# Altium PCB AlarmBJT.PcbDoc
Units mil, origin at the board's own origin, x right, y up, seen from the top; angles counter-clockwise.
Board outline 1331.05 x 2755.91 mil, 4 copper layers (Top Layer, Ground Plane, Power Plane, Bottom Layer), stack 59.692 mil thick; 40 components, 28 nets, 161 pads, 96 vias.
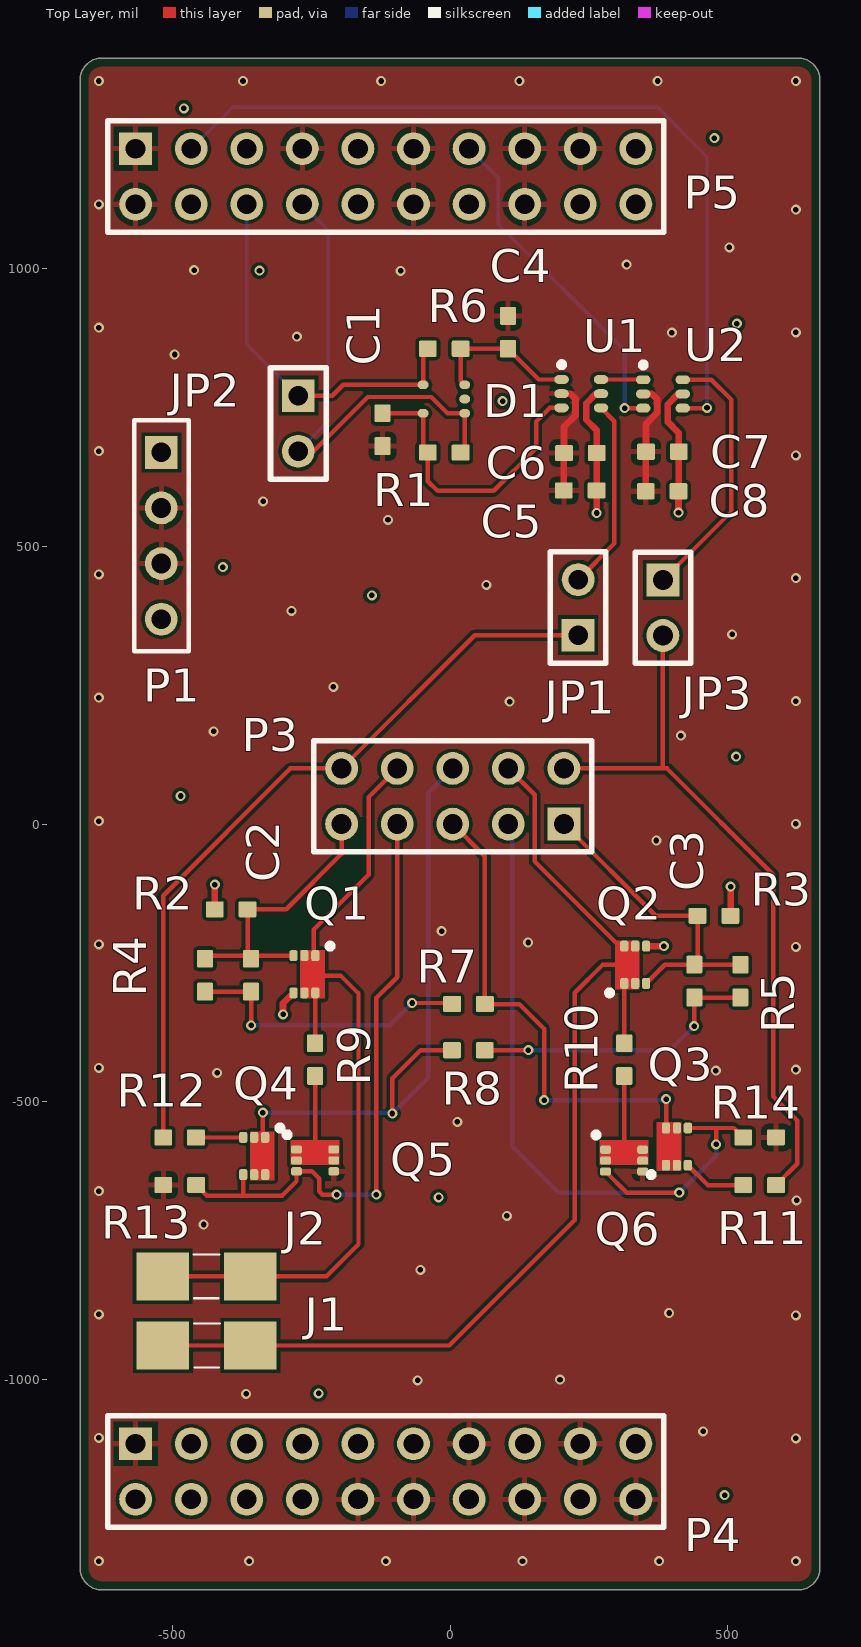
[diagram p0: Top Layer view]
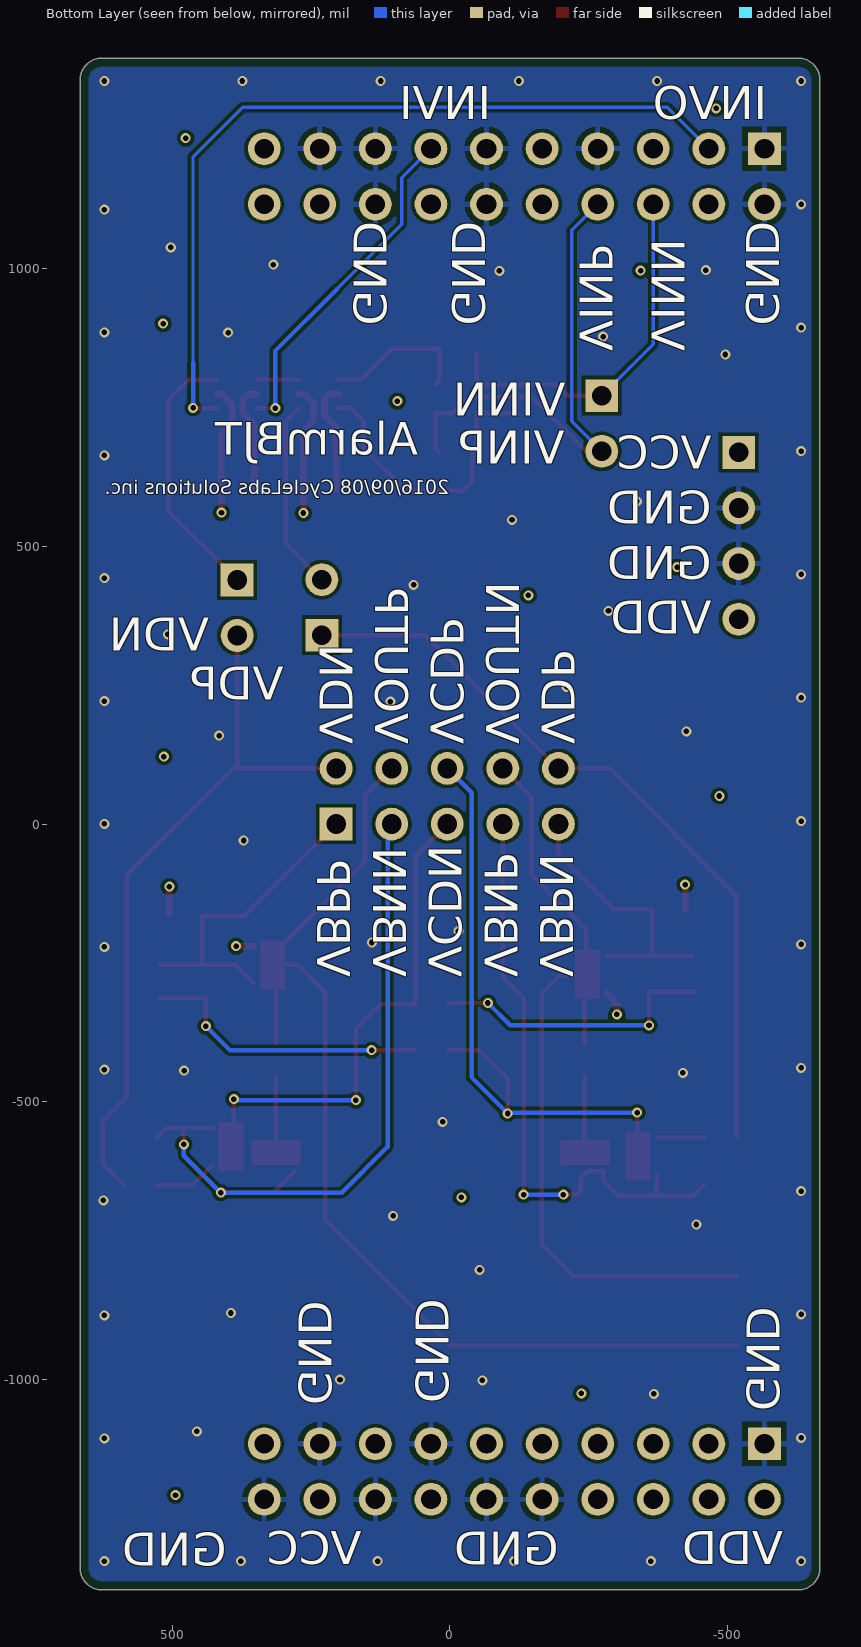
[diagram p1: Bottom Layer view, seen from below]
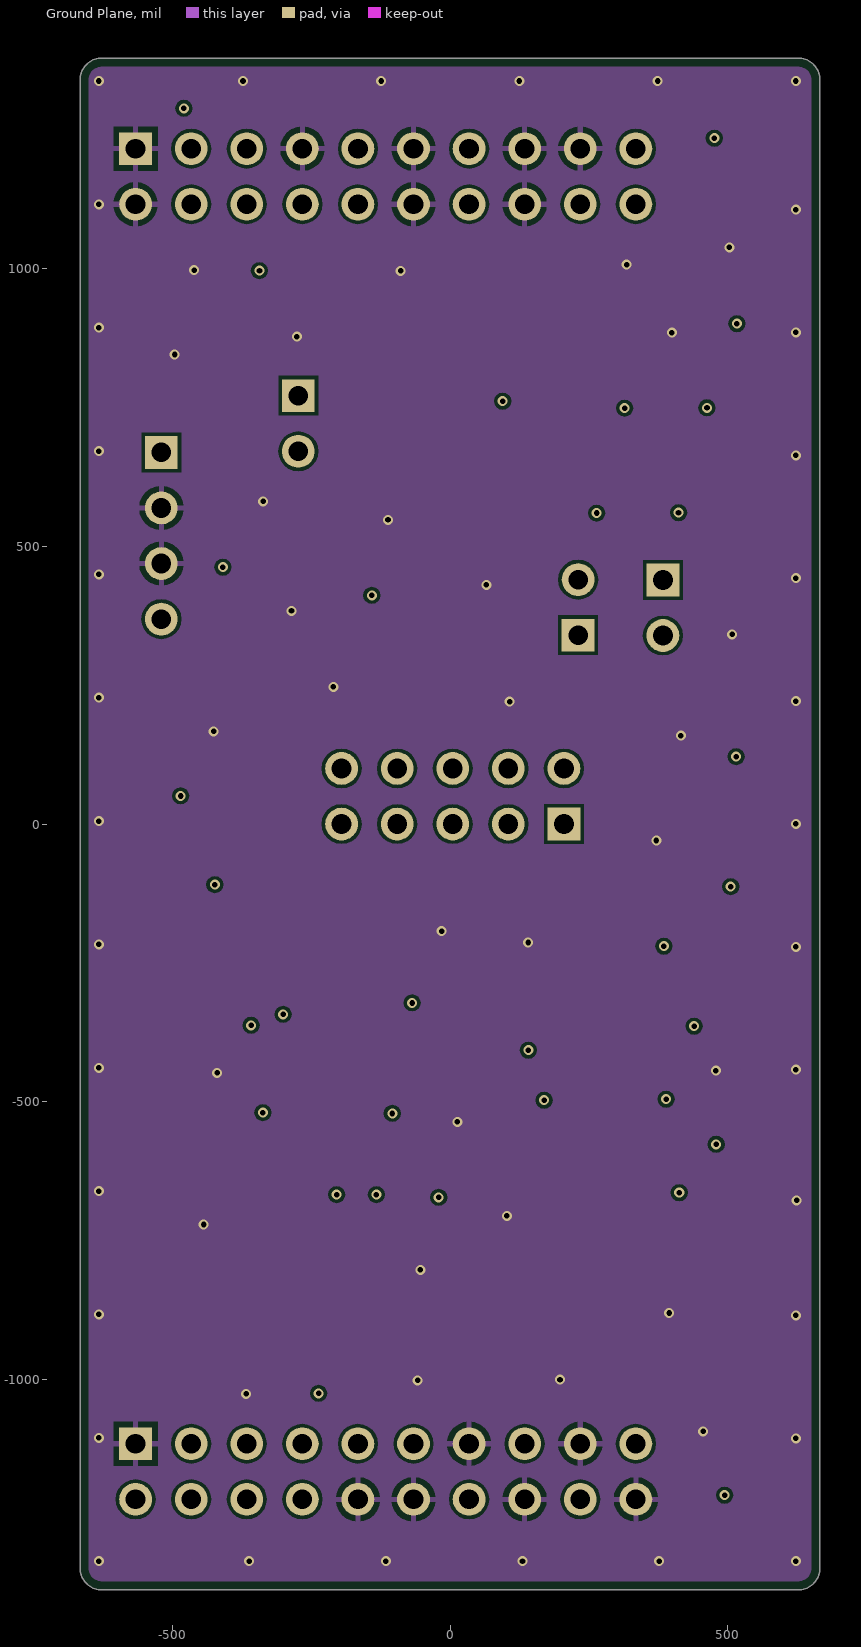
[diagram p2: Ground Plane]
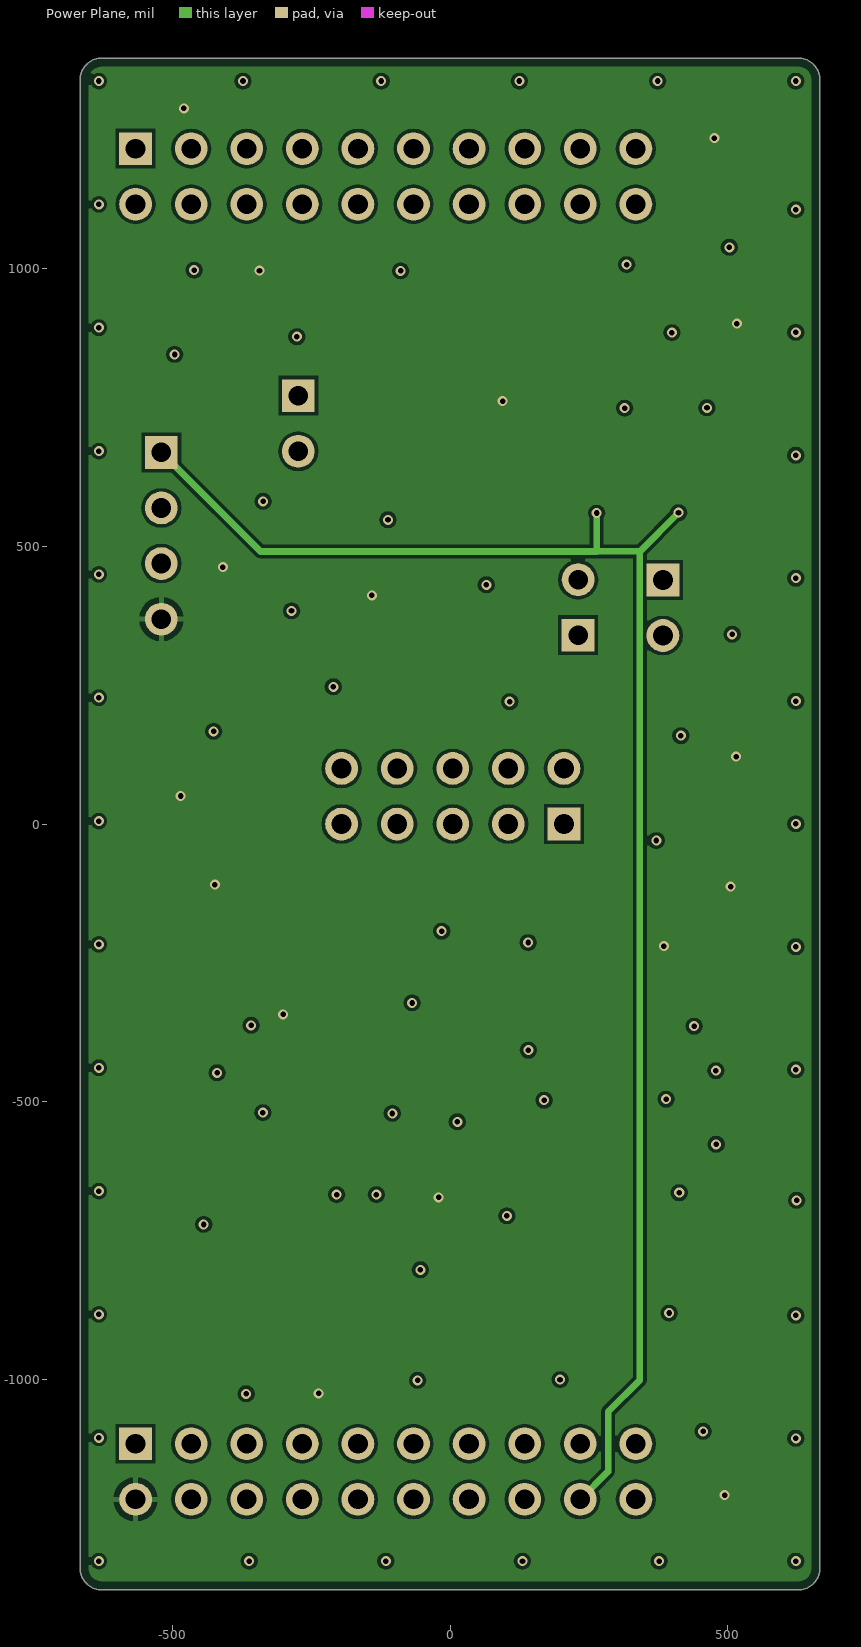
[diagram p3: Power Plane]

## Layer stack, top to bottom
Top Solder: solder mask 1, Solder Resist, Dk 4.8
Top Layer: signal copper 1.38
Prepreg Top: prepreg 6.811, 2116+1080, Dk 4.8
Ground Plane: signal copper 1.38
PCB Core: core 40.55, S1000-2, Dk 4.8
Power Plane: signal copper 1.38
Prepreg Bottom: prepreg 6.811, 2116+1080, Dk 4.8
Bottom Layer: signal copper 1.38
Bottom Solder: solder mask 1, Solder Resist, Dk 4.8

## Board outline
-665.55,-1338.58 ccw(c-626.18,-1338.58) -626.18,-1377.95 626.13,-1377.95 ccw(c626.13,-1338.58) 665.5,-1338.58 665.5,1338.58 ccw(c626.13,1338.58) 626.13,1377.95 -626.18,1377.95 ccw(c-626.18,1338.58) -665.55,1338.58

## Design rules (kind name [scope] priority, off if disabled: settings)
AcuteAngle [All] p1: minimum=6.00000000000000E+0001 checktracksonly=TRUE
AssemblyTestPointUsage AssemblyTestPointUsage_NoTP [InNet('ANT') Or InNet('RF') Or InNet('NetC20_2')  Or InNet('P0.09/NFC1') Or InNet('P0.10/NFC2') Or InNet('XC_N') Or InNet('XC_P') Or InNet('XL_N') Or InNet('XL_P')] p1: valid=1
AssemblyTestPointUsage AssemblyTestPointUsage_Power [InNet('VDD_NRF') Or InNet('VLED') OR InNet('PGND') OR InNet('GND') OR InNet('VBZ') OR InNet('VUSB') Or InNet('VBAT') Or InNet('DGND') Or InNet('AGND') Or InNet('S2V8')] p2: allowmultiple=TRUE
AssemblyTestPointUsage [All] p3:
AssemblyTestpoint AssemblyTestpoint_TP [InComponent('TP*')] p1: testpointundercomponent=TRUE minsize=35 maxsize=59.06 preferedsize=35 minholesize=0 maxholesize=39.37 preferedholesize=10 testpointgrid=1 usegrid=FALSE gridoriginx=2810.98 gridoriginy=2760.98 gridtolerance=0.01 allowsidebottom=TRUE minspacing=83
AssemblyTestpoint AssemblyTestpoint_ShortComponents [((IsPad And (OnTopLayer Or OnBottomLayer)) Or (IsVia) Or (IsPad And OnMultiLayer)) And (IsComponent And (Height < 150))] p2: testpointundercomponent=TRUE minsize=35 maxsize=59.06 preferedsize=35 minholesize=0 maxholesize=39.37 preferedholesize=10 testpointgrid=1 usegrid=FALSE gridoriginx=2810.98 gridoriginy=2760.98 gridtolerance=0.01 allowsidebottom=TRUE minspacing=83 compbodyclearance=40
AssemblyTestpoint AssemblyTestpoint_TallComponents [(IsPad And (OnTopLayer Or OnBottomLayer)) Or (IsVia) Or (IsPad And OnMultiLayer)] p3: testpointundercomponent=TRUE minsize=35 maxsize=59.06 preferedsize=35 minholesize=0 maxholesize=39.37 preferedholesize=10 testpointgrid=1 usegrid=FALSE gridtolerance=0.01 allowsidebottom=TRUE minspacing=83 compbodyclearance=55
BoardOutlineClearance BoardOutlineClearance_Component [IsComponent] p1: gap=66
BoardOutlineClearance [All] p2: gap=15
Clearance Clearance_Hole_Copper [InPadClass('NPTH')] p1: gap=8
Clearance Clearance_QFN_DFN_SOT563 [HasFootprint('QFN-44') Or HasFootprint('DFN10') Or HasFootprint('SOT563')] p2: gap=4
Clearance [All] p3: gap=6
ComponentClearance ComponentClearance_COAXSWITCH [HasFootprint('COAXIAL-SWF') Or InComponent('TP*')] p1: gap=0 collisioncheckmode=3 verticalgap=0 showdistances=FALSE
ComponentClearance [All] p2: gap=10 collisioncheckmode=3 verticalgap=10 showdistances=FALSE
DiffPairsRouting [Not InDifferentialPair('BZ_OUT')] p1: maxlimit=10 minlimit=6 mostfreqgap=8 toplayer_minwidth=6 toplayer_maxwidth=10 toplayer_prefwidth=8 midlayer1_minwidth=6 midlayer1_maxwidth=10 midlayer1_prefwidth=8 midlayer2_minwidth=6 midlayer2_maxwidth=10 midlayer2_prefwidth=8 bottomlayer_minwidth=6 bottomlayer_maxwidth=10 bottomlayer_prefwidth=8 maxuncoupledlength=500
FabricationTestPointUsage FabricationTestPointUsage_NoTP [InNet('ANT') Or InNet('RF') Or InNet('NetC20_2') Or InNet('P0.09/NFC1') Or InNet('P0.10/NFC2') Or InNet('XC_N') Or InNet('XC_P') Or InNet('XL_N') Or InNet('XL_P')] p1: valid=1 allowmultiple=FALSE
FabricationTestPointUsage FabricationTestPointUsage_Power [InNet('VDD_NRF') Or InNet('VLED') OR InNet('PGND') OR InNet('GND') OR InNet('VBZ') OR InNet('VUSB') Or InNet('VBAT') Or InNet('DGND') Or InNet('AGND') Or InNet('S2V8')] p2: valid=0 allowmultiple=TRUE
FabricationTestPointUsage [All] p3: valid=0 allowmultiple=FALSE
FabricationTestpoint FabricationTestpoint_TP [InComponent('TP*')] p1: side=2 testpointundercomponent=TRUE minsize=35 maxsize=59.06 preferedsize=35 minholesize=0 maxholesize=39.37 preferedholesize=10 testpointgrid=1 allowsidebottom=TRUE usegrid=FALSE gridtolerance=0.01 minspacing=83
FabricationTestpoint FabricationTestpoint_ShortComponents [((IsPad And (OnTopLayer Or OnBottomLayer)) Or (IsVia) Or (IsPad And OnMultiLayer)) And (IsComponent And (Height < 150))] p2: side=2 testpointundercomponent=TRUE minsize=35 maxsize=59.06 preferedsize=35 minholesize=0 maxholesize=39.37 preferedholesize=10 testpointgrid=1 allowsidebottom=TRUE usegrid=FALSE gridtolerance=0.01 minspacing=83 compbodyclearance=40
FabricationTestpoint FabricationTestpoint_TallComponents [(IsPad And (OnTopLayer Or OnBottomLayer)) Or (IsVia) Or (IsPad And OnMultiLayer)] p3: side=2 testpointundercomponent=TRUE minsize=35 maxsize=59.06 preferedsize=35 minholesize=0 maxholesize=39.37 preferedholesize=10 testpointgrid=1 allowsidebottom=TRUE usegrid=FALSE gridoriginx=2810.98 gridoriginy=2760.98 gridtolerance=0.01 minspacing=83 compbodyclearance=55
FanoutControl Fanout_LCC [IsLCC] p1: bgadir=Out bgaviamode=Centered fanoutstyle=Auto fanoutdirection=Alternating viagrid=1 // Fanout_LCC (Default Rule)
FanoutControl Fanout_BGA [IsBGA] p2: bgadir=Out bgaviamode=Centered fanoutstyle=Auto fanoutdirection=Alternating viagrid=1 // Fanout_BGA (Default Rule)
FanoutControl Fanout_Small [(CompPinCount < 5)] p3: bgadir=Out bgaviamode=Centered fanoutstyle=Auto fanoutdirection=OutThenIn viagrid=1 // Fanout_Small (Default Rule)
FanoutControl Fanout_SOIC [IsSOIC] p4: bgadir=Out bgaviamode=Centered fanoutstyle=Auto fanoutdirection=Alternating viagrid=1 // Fanout_SOIC (Default Rule)
HoleSize [All] p1: absolutevalues=TRUE maxlimit=100 minlimit=10 maxpercent=80.000 minpercent=20.000
HoleToHoleClearance [All] p1: gap=6 allowstackedmicrovias=TRUE
MinimumAnnularRing [All] p1: minimumring=4
MinimumSolderMaskSliver MinimumSolderMaskSliver_QFN_DFN [IsVia And (HasFootprint('DSQ10-1500X900TP') Or HasFootprint('QFN-44')) vs IsVia And (HasFootprint('DSQ10-1500X900TP') Or HasFootprint('QFN-44'))] p1: minsoldermaskwidth=0
MinimumSolderMaskSliver MinimumSolderMaskSliver_QFN_DFN_1 [HasFootprint('QFN40P600X600X90-48N') Or HasFootprint('DSQ10-1500X900TP') Or HasFootprint('DRC10-2400X1650TP') Or HasFootprint('DRV6-1600X1000TP') Or HasFootprint('WDFN8') Or HasFootprint('59453061110ECHLF') vs HasFootprint('QFN40P600X600X90-48N') Or HasFootprint('DSQ10-1500X900TP') Or HasFootprint('DRC10-2400X1650TP') Or HasFootprint('DRV6-1600X1000TP') Or HasFootprint('WDFN8') Or HasFootprint('59453061110ECHLF')] p2: minsoldermaskwidth=2
MinimumSolderMaskSliver MinimumSolderMaskSliver_QFN_DFN_2 [IsPad And (HasFootprint('QFN-44')) vs IsPad And (HasFootprint('QFN-44'))] p3: minsoldermaskwidth=0
MinimumSolderMaskSliver [All] p4: minsoldermaskwidth=4
PolygonConnect PolygonConnect_Direct [(IsVia And InNet('GND')) Or (IsVia And InNet('VCC')) Or (IsVia And InNet('VDD'))] p1: connectstyle=Direct reliefconductorwidth=10 reliefentries=4 polygonreliefangle="90 Angle" airgapwidth=10
PolygonConnect [All] p2: connectstyle=Relief reliefconductorwidth=10 reliefentries=4 polygonreliefangle="90 Angle" airgapwidth=10
RoutingVias [All] p1: holewidth=13 width=27 viastyle="Through Hole" minholewidth=10 minwidth=18 maxholewidth=28 maxwidth=50
SilkToBoardRegionClearance SilkToBoardRegionClearance_1 [All] p2:
SolderMaskExpansion [All] p1: expansion=0
Width Width_RF [InNet('ANT') Or InNet('RF') Or InNet('NetC17_2')] p1 off: maxlimit=20 minlimit=10.43 preferedwidth=15 toplayer_maxwidth=10.43 toplayer_prefwidth=10.43 midlayer1_minwidth=12 midlayer2_minwidth=12 bottomlayer_maxwidth=10.43 bottomlayer_prefwidth=10.43 impedancedriven=TRUE minimp=0.000000 maximp=500.000000 favimp=200.000000
Width Width_Power [InNet('VCC') Or InNet('VDD') Or InNet('GND')] p2: maxlimit=50 minlimit=8 preferedwidth=12
Width [All] p3: maxlimit=16 minlimit=6 preferedwidth=6
17 further rules are at their usual default settings.

## Classes and differential pairs
component class U_2_ALARM: C1 C2 C3 C4 C5 C6 C7 C8 D1 JP1 JP2 JP3 Q1 Q2 Q3 Q4 Q5 Q6 R1 R2 R3 R4 R5 R6 R7 R8 R9 R10 R11 R12 R13 R14 U1 U2
component class 1_TOP: J1 J2 P1 P3 P4 P5

## Components (designator, comment, footprint, x,y, rotation, side; value= is the part's Value field where it differs from the comment)
C1 "1 nF" Varitron_CAP0603 -121.5,709.4 r90 top
C2 "220 pF" Varitron_CAP0603 -358,-272 r90 top
C3 "220 pF" Varitron_CAP0603 439.5,-282.5 r90 top
C4 "1 nF" Varitron_CAP0603 104.4,884.6 r270 top
C5 "1.0 uF" Varitron_CAP0603 234.2,600.2 r180 top
C6 "100 nF" Varitron_CAP0603 234.6,667.4 r180 top
C7 "100 nF" Varitron_CAP0603 382.1,669.8 r180 top
C8 "100 nF" Varitron_CAP0603 381.6,598.7 r180 top
D1 "#NAME?" SC70-5 -11,764.5 r90 top
J1 "709296001002006" 709296001002006 -437.8,-938.2 r180 top
J2 "709296001002006" 709296001002006 -438.5,-813.8 r180 top
JP1 "JMP_2PINS_100MILS" HDR_2X1_100MILS 230.5,339.6 r180 top
JP2 "JMP_2PINS_100MILS" HDR_2X1_100MILS -273,770.5 r0 top
JP3 "JMP_2PINS_100MILS" HDR_2X1_100MILS 383,439.1 r0 top
P1 "MTLW-104-07-L-S-125" SMTC-MTLW-104-07-X-S-125 -519.4,668.6 r270 top
P3 "HDR_2x5_100MILS" HDR_2X5_100MILS 204.9,-0.1 r180 top
P4 "HDR_2x10_100MILS" HDR_2X10_100MILS -565.7,-1115 r0 top (schematic designator P6)
P5 "HDR_2x10_100MILS" HDR_2X10_100MILS -565.7,1215 r0 top (schematic designator P7)
Q1 "#NAME?" SOT563 -262,-270.27 r180 top
Q2 "#NAME?" SOT563 333.1,-253.3 r0 top
Q3 "#NAME?" SOT563 408.1,-580.43 r0 top
Q4 "#NAME?" SOT563 -352.3,-597.4 r180 top
Q5 "#NAME?" SOT563 -242.7,-605.2 r270 top
Q6 "#NAME?" SOT563 313.2,-605.6 r270 top
R1 "1.8k Ohm" Varitron_RES0603 -10.5,668.2 r0 top
R2 "3.3k Ohm" Varitron_RES0603 -393.7,-153.5 r180 top
R3 "3.3k Ohm" Varitron_RES0603 474.9,-165.2 r0 top
R4 "3.3k Ohm" Varitron_RES0603 -440.7,-272 r90 top
R5 "3.3k Ohm" Varitron_RES0603 522.3,-282.7 r90 top
R6 "1.8k Ohm" Varitron_RES0603 -10.4,855.1 r180 top
R7 "0.0 Ohm" Varitron_RES0603 33.2,-323.9 r180 top
R8 "0.0 Ohm" Varitron_RES0603 32.9,-407 r180 top
R9 "0.0 Ohm" Varitron_RES0603 -242.6,-423.9 r270 top
R10 "0.0 Ohm" Varitron_RES0603 313.4,-423.9 r270 top
R11 "10k Ohm" Varitron_RES0603 557,-649.6 r0 top
R12 "10k Ohm" Varitron_RES0603 -486.6,-564 r180 top
R13 "3.3k Ohm" Varitron_RES0603 -486.3,-649.6 r180 top
R14 "3.3k Ohm" Varitron_RES0603 557,-563.7 r180 top
U1 "#NAME?" SOT363_SC70_6 236.2,774.2 r270 top
U2 "#NAME?" SOT363_SC70_6 383.1,773.7 r270 top

## Footprints (in the part's own frame and the unit in brackets; to place one, negate y for a bottom-side part, rotate by r counter-clockwise, add the part's x,y. Pads: shape width x height; smd on the part's side, far side on the other; paste and mask are expansions set on the pad)
709296001002006 [mm] "Connector Wire to Board, 2.0 x 2.0 mm, 2 pads, 2.4 x 2.2 mm, 4 mm pitch"
  rect 2.4x2.2 smd: 1(-2,0) 1(2,0)
  silkscreen extent -0.6,-1 0.58,1, body extent -3,-1 3,1, height 2
HDR_2X1_100MILS [mm] "Header 100 mils, 2 rows, 2 pins. 0.9mm hole, 1.5 mm side"
  rect 1.5x1.5 hole 0.9: 1(0,0)
  round 1.5 hole 0.9: 2(0,-2.54)
  silkscreen extent -1.27,-3.81 1.27,1.27
HDR_2X5_100MILS [mm] "Header 100 mils, 2 rows, 10 pins. 0.9mm hole, 1.5 mm side"
  rect 1.5x1.5 hole 0.9: 1(0,0)
  round 1.5 hole 0.9: 2(0,-2.54) 3(2.54,0) 4(2.54,-2.54) 5(5.08,0) 6(5.08,-2.54) 7(7.62,0) 8(7.62,-2.54) 9(10.16,0) 10(10.16,-2.54)
  silkscreen extent -1.27,-3.81 11.43,1.27
HDR_2X10_100MILS [mm] "Header 100 mils, 2 rows, 20 pins. 0.9mm hole, 1.5 mm side"
  rect 1.5x1.5 hole 0.9: 1(0,0)
  round 1.5 hole 0.9: 2(0,-2.54) 3(2.54,0) 4(2.54,-2.54) 5(5.08,0) 6(5.08,-2.54) 7(7.62,0) 8(7.62,-2.54) 9(10.16,0) 10(10.16,-2.54) 11(12.7,0) 12(12.7,-2.54) 13(15.24,0) 14(15.24,-2.54) 15(17.78,0) 16(17.78,-2.54) 17(20.32,0) 18(20.32,-2.54) 19(22.86,0) 20(22.86,-2.54)
  silkscreen extent -1.27,-3.81 24.13,1.27
SC70-5 [mm] "SC70-5, 0.4 x 0.5 mm pads, 0.65 x 1.9 mm pitch"
  oval 0.4x0.5 smd mask+0.051: 1(-0.65,-0.95) 2(0,-0.95) 3(0.65,-0.95) 4(0.65,0.95) 5(-0.65,0.95)
  body extent -1,-0.63 1,0.63, height 1.1
SMTC-MTLW-104-07-X-S-125 [mm] "Terminal Assembly, 1x4 Pins, Vertical, 2.54mm Pitch, Male"
  rect 1.5x1.5 hole 0.9: 1(0,0)
  round 1.5 hole 0.9: 2(2.54,0) 3(5.08,0) 4(7.62,0)
  silkscreen extent -1.46,-1.24 9.08,1.24, body extent -1.27,-1.24 8.89,1.24, height 4.7
SOT363_SC70_6 [mil] "SOT363-6, SC70, 2 x 1.25 x 1 mm body, 16 x 26 mils pads, 26 x 71 mils pitch"
  oval 16x26 smd mask+2: 1(-25.5,-35.5) 2(0,-35.5) 3(25.5,-35.5) 4(25.5,35.5) 5(0,35.5) 6(-25.5,35.5)
  silkscreen extent -57,-40 -47,-31, body extent -39,-25 39,25, height 39
SOT563 [mm] "SOT563, 1.25 x 1.7 mm body, 6 pins, 0.375 x 0.5 mm pads, 0.5 x 1.7 mm pitch"
  rrect50% 0.375x0.5 smd mask+0: 1(-0.5,-0.85) 2(0,-0.85) 3(0.5,-0.85) 4(0.5,0.85) 5(0,0.85) 6(-0.5,0.85)
  silkscreen extent -1.3,-1.41 -1.05,-1.16, body extent -0.85,-0.63 0.85,0.63, height 0.6
Varitron_CAP0603 [mil] "Capacitor 0603(1608), max 1mm height"
  rrect17% 32x29 smd: 1(-29.5,0) 2(29.5,0)
  body extent -33,-19 33,19, height 39
Varitron_RES0603 [mil] "Resistor 0603(1608), max 1mm height"
  rrect17% 32x29 smd: 1(-29.5,0) 2(29.5,0)
  body extent -33,-19 33,19, height 39

## Part data
C1: library part Varitron_CAP0603, "1 nF 10V X7R 10% 0603 (1608 Metric)  SMD"
C2 C3: library part Varitron_CAP0603, "220 pF 50V X7R 10% 0603 (1608 Metric)  SMD"
C4: library part Varitron_CAP0603, "1 nF V TEMP TOL% 0603 (1608 Metric)  SMD"
C5 C8: library part Varitron_CAP0603, "1.0 uF 16V X7R 10% 0603 (1608 Metric)  SMD"
C6 C7: library part Varitron_CAP0603, "100 nF 16V X7R 10% 0603 (1608 Metric)  SMD"
D1: library part BAS21DW5T1G, "High Voltage Switching Diode"
J1 J2: "Connector, Single Horizontal Contact, 2 x 2 mm"
JP1 JP2 JP3: "Jumper, 100 mils, 2 pins"
P1: library part SMTC-MTLW-104-07-X-S-125, "Low Profile .025\" SQ Post Header, Through-hole, Vertical, -55 to 125 degC, 2.54 mm Pitch, 4-Pin, Male, RoHS"
P3: "Header, 100 mils, 2 rows, 10 pins"
P4 P5: "Header, 100 mils, 2 rows, 20 pins"
Q1 Q2: library part DSS5140V, "PNP SMT Transistor, Low VCESAT"
Q3 Q4 Q5 Q6: library part DSS4240V, "NPN SMT Transistor, Low VCESAT"
R1 R6: library part Varitron_RES0603, "1k8 0.063W 5%  0603 (1608 Metric)  SMD"
R2 R3 R4 R5 R13 R14: library part Varitron_RES0603, "3k3 0.063W 5%  0603 (1608 Metric)  SMD"
R7 R8 R9 R10: library part Varitron_RES0603, "0R0 0..1W JUMPER  0603 (1608 Metric)  SMD"
R11 R12: library part Varitron_RES0603, "10k 0.063W 5%  0603 (1608 Metric)  SMD"
U1: library part NL27WZ14DFT2G, "IC Dual Inverter with Schmitt Trigger Inputs"
U2: library part 74LVC2GU04DCKRG4, "Dual Inverter Gate"

## Via types
v1: diameter 18, hole 10, Top Layer to Bottom Layer, tented both sides, 76 vias
v2: diameter 18, hole 10, Top Layer to Bottom Layer, tented top, 20 vias

## Nets (pads, with @x,y where several pads share a name; then routed paths per layer and width w, separated by ;. In a path a pad name is that pad's centre, name@x,y a point inside that pad or via, vN(x,y) a via of type N, cw(c..) or ccw(c..) an arc to the next point about the centre after c; other vN are vias at no path point)
GND: C1.1 C4.1 C5.2 C6.2 C7.2 C8.2 P1.2 P1.3 P4.1 P4.10 P4.12 P4.13 P4.16 P4.17 P4.20 P5.1 P5.2 P5.7 P5.11 P5.12 P5.15 P5.16 P5.17 Q5.4 Q6.4 R13.2 R14.1 U1.2 U2.2 | length 405.2
  Top Layer w12: U1.2 216.4,774.2 225.7,764.9 225.7,735.2 205.1,714.6 C6.2 204.7,667 C5.2 ; U2.2 363.2,773.7 372.6,764.3 372.6,739.92 352.6,719.92 C7.2 352.1,669.3 C8.2
  other v1: -631.8,-1326.2 -361.28,-1326.2 -115.46,-1326.2 130.36,-1326.2 376.18,-1326.2 622,-1326.2 622,-1105.14 -631.8,-1104.29 455.3,-1092.6 -366.8,-1025.1 -58.3,-1000.9 197.9,-999.6 622,-884.08 -631.8,-882.38 394.1,-879.8 -53.2,-802 -443.2,-720.5 102.3,-705.2 623.6,-677.1 -631.8,-660.48 13.1,-535.7 -419,-447.7 478.3,-443.9 622,-441.97 -631.8,-438.57 622,-220.91 -631.8,-216.66 140.5,-213.2 -15,-192.8 371.2,-29.7 622,0.15 -631.8,5.25 415.2,158.9 -425.4,166.6 107.4,220.1 622,221.21 -631.8,227.16 -210,246.9 507.6,341.2 -285.2,383.3 65.3,430.4 622,442.27 -631.8,449.07 -111.6,547.2 -336.3,580.5 622,663.32 -631.8,670.97 -495.5,844.7 -275.7,876.8 399.2,884.2 622,884.38 -631.8,892.88 -88.9,995.1 -460.5,996.5 317.7,1006.5 502.4,1037.6 622,1105.44 -631.8,1114.79 -631.8,1336.7 -372.48,1336.7 -123.86,1336.7 124.76,1336.7 373.38,1336.7 622,1336.7
INV_IN: P5.13 U2.3 | length 616.2
  Top Layer w8: v2(314.1,748.2) U2.3
  Bottom Layer w6: P5.13 86.8,1162.5 86.8,1079 203.1,962.7
  Bottom Layer w8: 203.1,962.7 314.1,851.7 v2(314.1,748.2)
INV_OUT: P5.3 U2.4 | length 1491.4
  Top Layer w8: U2.4 461.8,748.2 v2(462.3,748.7)
  Bottom Layer w6: P5.3 -391.2,1289.5 373.3,1289.5 462.3,1200.5 462.3,830.2
  Bottom Layer w8: v2(462.3,748.7) 462.3,830.2
NetC1_2: C1.2 D1.5 R1.1 U1.3 | length 524.8
  Top Layer w8: C1.2 D1.5 R1.1@-48.4,676.6 ; R1.1 -40,616.9 -22.4,599.3 78.5,599.3 154.8,675.6 154.8,723.8 179.7,748.7 U1.3
NetC2_1: C2.1 R4.1 R7.2 | length 521.4
  Top Layer w8: R4.1 C2.1 v2(-358,-362.1) ; v2(-68.3,-322) 1.8,-322 R7.2@3,-323.2
  Bottom Layer w8: v2(-358,-362.1) -108.4,-362.1 v2(-68.3,-322)
NetC3_1: C3.1 R5.1 R8.1 | length 528.5
  Top Layer w8: R8.1 v2(141,-407) ; v2(439.1,-363.7) C3.1@439.1,-312.4 ; C3.1@439.7,-312.2 R5.1
  Bottom Layer w8: v2(141,-407) 395.8,-407 v2(439.1,-363.7)
NetC4_2: C4.2 D1.3 R6.1 U1.1 | length 272.6
  Top Layer w8: D1.3 19.1,797.39 R6.1 C4.2 159.8,799.7 U1.1
NetJP1_2: JP1.2 U1.4 | length 346
  Top Layer w8: JP1.2 295.7,504.8 295.7,724.7 U1.4
NetJP3_1: JP3.1 U2.6 | length 477.7
  Top Layer w8: JP3.1 506.3,562.4 506.3,763.1 470.2,799.2 U2.6
NetQ3_3: Q3.3 R11.1 | length 114.5
  Top Layer w8: Q3.3 463.49,-649.6 R11.1
NetQ4_3: Q4.3 R12.1 | length 85.1
  Top Layer w8: R12.1 Q4.3@-372.05,-564
NetQ5_1: Q5.1 Q5.2 Q5.5 Q5.6 R9.2 | length 127.5
  Top Layer w8: -242.6,-580.9 R9.2
NetQ6_1: Q6.1 Q6.2 Q6.5 Q6.6 R10.2 | length 133
  Top Layer w8: 313.4,-586.4 R10.2
NetU1_6: U1.6 U2.1 | length 75.4
  Top Layer w8: U1.6 U2.1@347.1,799.7
VB_NMOS_N: P3.3 Q3.4 Q6.3 R14.2 | length 1316.9
  Top Layer w8: Q6.3 317.75,-663.3 v2(412.4,-663.3) ; Q3.4 478.9,-546.97 ; v2(478.9,-576.3) 478.9,-546.97 ; R14.2 510.77,-546.97 478.9,-546.97
  Bottom Layer w8: P3.3 112.3,-7.5 112.3,-580.6 195,-663.3 v2(412.4,-663.3) 478.9,-596.8 v2(478.9,-576.3)
VB_NMOS_P: P3.7 Q4.4 Q5.3 R13.1 | length 1111.3
  Top Layer w8: R13.1 -437.4,-669 -302.2,-669 -276.16,-642.96 Q5.3 -248.41,-624.89 -235.4,-637.9 -235.4,-660.9 -229.5,-666.8 v2(-204,-666.8) ; -371.98,-667.99 Q4.4 ; v2(-132.5,-666.8) -132.5,-312.9 -95.1,-275.5 P3.7
  Bottom Layer w8: v2(-204,-666.8) v2(-132.5,-666.8)
VB_PMOS_N: C2.2 P3.9 Q1.3 R2.1 R4.2 | length 500.2
  Top Layer w8: R4.2@-435,-236.8 Q1.3 ; C2.2@-364.2,-236.3 R2.1 -294.9,-153.5 -195.1,-53.7 P3.9
VB_PMOS_P: C3.2 P3.1 Q2.3 R3.1 R5.2 | length 574.2
  Top Layer w8: P3.1 370,-165.2 R3.1 C3.2@445.4,-247.1 ; Q2.3 386.35,-253.2 R5.2
VC_DARL_N: P3.5 Q3.1 Q3.2 Q3.5 Q3.6 R7.1 | length 873.4
  Top Layer w8: P3.5 62.7,-57.9 R7.1 124.5,-323.9 169.2,-368.6 v2(169.2,-497) ; Q3.6 388.7,-546.68 v2(388.7,-495.1)
  Bottom Layer w8: v2(169.2,-497) 386.8,-497 v2(388.7,-495.1)
VC_DARL_P: P3.6 Q4.1 Q4.2 Q4.5 Q4.6 R8.2 | length 1154.1
  Top Layer w8: -336.6,-582.7 v2(-336.6,-519.1) ; v2(-103.8,-520.8) -103.8,-457.8 -53,-407 R8.2
  Bottom Layer w8: v2(-336.6,-519.1) -105.5,-519.1 v2(-103.8,-520.8) -39,-456 -39,56 P3.6
VCC: C5.1 C6.1 C7.1 C8.1 P1.1 P4.18 U1.5 U2.5 | length 3329
  Top Layer w8: C6.1@263.7,667 C6.1 ; C8.1 C8.1@411.6,599.2
  Top Layer w12: v2(263.7,559.5) C5.1 C6.1@263.7,667 ; C6.1 264.1,708.1 245,727.2 245,756.7 262.5,774.2 U1.5 ; v2(411.1,560) C8.1 ; C8.1@411.6,599.2 C7.1 411.6,703.5 391.9,723.2 391.9,755.3 410.3,773.7 U2.5
  Power Plane w8: 263.7,491.1 264.3,490.5
  Power Plane w12: P1.1 -341.1,490.3 263.7,490.3 ; P4.18 284.4,-1164.9 284.4,-1057.4 341.47,-1000.33 341.47,490.37 341.6,490.5 ; 263.7,491.1 v2(263.7,559.5) ; 264.3,490.5 341.6,490.5 ; v2(411.1,560) 341.6,490.5
VDD: P1.4 P4.2 Q1.4 Q2.4 R2.2 R3.2 | length 172.1
  Top Layer w12: R2.2 v2(-423.2,-108.9) ; v2(-300.4,-342.5) -300.4,-322.45 Q1.4 ; Q2.4 v2(384.86,-219.84) ; R3.2@505,-161.4 v2(505,-112.5)
  other v1: 493.9,-1207.6 -236.4,-1024.5 -20.3,-671.9 -484.7,50.4 514.6,121.3 -140.8,411.3 -408.5,462 94.8,760.6 516.1,900.1 -342.8,995.7 475.5,1233.9 -478.7,1287.6
VDN: JP3.2 P3.2 R11.2 | length 1286.5
  Top Layer w8: P3.2 390.5,99.9 581.6,-91.2 581.6,-490.1 624.9,-533.4 624.9,-611.2 R11.2 ; 383,100.7 JP3.2
VDP: JP1.1 P3.10 R12.2 | length 1375.8
  Top Layer w8: R12.2 -516.1,-128.9 -287.3,99.9 P3.10 44.6,339.6 JP1.1
VINN: D1.4 JP2.1 P5.6 R6.2 | length 672.1
  Top Layer w8: JP2.1 -211.9,770.5 -192.31,790.09 D1.4 R6.2@-48.4,846.6
  Bottom Layer w6: P5.6 -365.7,863.2 JP2.1
VINP: D1.1 JP2.2 P5.8 R1.2 | length 912.2
  Top Layer w8: JP2.2 -245.5,670.5 -147.8,768.2 -33.8,768.2 -4.51,738.91 D1.1 26.4,675.6 R1.2
  Bottom Layer w6: JP2.2 -218.8,724.7 -218.8,1068.1 P5.8
VOUTN: J2.1 P3.8 Q1.1 Q1.2 Q1.5 Q1.6 R9.1 | length 1447.4
  Top Layer w8: J2.1@-517.24,-813.8 -359.76,-813.8 -222.2,-813.8 -164.7,-756.3 -164.7,-304.9 -196.2,-273.4 -245.2,-273.4 -245.2,-189.8 -146.4,-91 -146.4,48.6 P3.8 ; R9.1 Q1.6@-242.6,-303.73
VOUTP: J1.1 P3.4 Q2.1 Q2.2 Q2.5 Q2.6 R10.1 | length 1881.4
  Top Layer w8: J1.1@-516.54,-938.2 -359.06,-938.2 -1.3,-938.2 224.4,-712.5 224.4,-303.4 274.3,-253.5 316.7,-253.5 ; P3.4 152.3,52.5 152.3,-67.4 304.74,-219.84 Q2.6 ; R10.1 Q2.1@313.4,-280.7
pads on no net: D1.2 P4.3 P4.4 P4.5 P4.6 P4.7 P4.8 P4.9 P4.11 P4.14 P4.15 P4.19 P5.4 P5.5 P5.9 P5.10 P5.14 P5.18 P5.19 P5.20

## Polygon pours and split planes (outlines as drawn)
GND on Top Layer "TOP GND" (solid, remove dead copper, pour order 35): -665.55,-1338.58 ccw(c-626.18,-1338.58) -626.18,-1377.95 626.13,-1377.95 ccw(c626.13,-1338.58) 665.5,-1338.58 665.5,1338.58 ccw(c626.13,1338.58) 626.13,1377.95 -626.18,1377.95 ccw(c-626.18,1338.58) -665.55,1338.58
GND on Ground Plane "MID GND" (solid, remove dead copper, pour order 39): -660.65,-1338.68 ccw(c-621.28,-1338.68) -621.28,-1378.05 631.03,-1378.05 ccw(c631.03,-1338.68) 670.4,-1338.68 670.4,1338.48 ccw(c631.03,1338.48) 631.03,1377.85 -621.28,1377.85 ccw(c-621.28,1338.48) -660.65,1338.48
VDD on Power Plane "POWER PLANE" (solid, remove dead copper, pour order 41): -665.55,-1338.58 ccw(c-626.18,-1338.58) -626.18,-1377.95 626.13,-1377.95 ccw(c626.13,-1338.58) 665.5,-1338.58 665.5,1338.58 ccw(c626.13,1338.58) 626.13,1377.95 -626.18,1377.95 ccw(c-626.18,1338.58) -665.55,1338.58
GND on Bottom Layer "BOT GND" (solid, remove dead copper, pour order 37): -665.55,-1338.58 ccw(c-626.18,-1338.58) -626.18,-1377.95 626.13,-1377.95 ccw(c626.13,-1338.58) 665.5,-1338.58 665.5,1338.58 ccw(c626.13,1338.58) 626.13,1377.95 -626.18,1377.95 ccw(c-626.18,1338.58) -665.55,1338.58

## Other copper
Top Layer:
  region net VC_DARL_N: 415.6,-537 415.6,-623.7 415.4,-623.9 372,-623.9 372,-537 372.1,-537
  region net NetQ6_1: 269.6,-569.4 356.3,-569.4 356.5,-569.6 356.5,-613 269.6,-613 269.6,-612.9
  region net NetQ5_1: -286.3,-569 -199.6,-569 -199.4,-569.2 -199.4,-612.6 -286.3,-612.6 -286.3,-612.5
  region net VC_DARL_P: -316.1,-553.8 -316.1,-640.5 -316.3,-640.7 -359.7,-640.7 -359.7,-553.8 -359.6,-553.8
  region net VOUTN: -225.75,-227 -225.75,-313.7 -225.95,-313.9 -269.35,-313.9 -269.35,-227 -269.25,-227
  region net VOUTP: 296.9,-296.9 296.9,-210.2 297.1,-210 340.5,-210 340.5,-296.9 340.4,-296.9

## Silkscreen, mask and mechanical layers (free items; w line width, h text height)
Bottom Overlay:
  text "INVO" at -570.7,1267.9 h60
  text "INVI" at -74.4,1267.9 h60
  text "GND" at -532.7,896.5 h60 r90
  text "GND" at -4.1,896.5 h60 r90
  text "GND" at 173.2,896.5 h60 r90
  text "VINN" at -362.8,850.4 h60 r90
  text "VINP" at -233.8,850.4 h60 r90
  text "VINN" at -208.5,734.9 h60
  text "VINP" at -206.3,647.9 h60
  text "AlarmBJT" at 56.9,644.7 h100
  text "VCC" at -471.1,639 h60
  text "2016/09/08 CycleLabs Solutions inc." at 1.3,593.7 h25
  text "GND" at -471.1,540.4 h60
  text "GND" at -471.1,440.28 h60
  text "VDD" at -471.1,341.9 h60
  text "VDN" at 432.9,311.8 h60
  text "VDP" at 298.8,223.7 h60
  text "VDP" at -165.5,143.9 h60 r90
  text "VOUTN" at -65.5,143.9 h60 r90
  text "VCDP" at 34.5,143.9 h60 r90
  text "VOUTP" at 134.5,143.9 h60 r90
  text "VDN" at 234.5,143.9 h60 r90
  text "VBPN" at -162.3,-275.4 h60 r90
  text "VBNP" at -62.1,-275.4 h60 r90
  text "VCDN" at 38.1,-275.4 h60 r90
  text "VBNN" at 138.3,-275.4 h60 r90
  text "VBPP" at 238.5,-275.4 h60 r90
  text "GND" at 61.9,-1042.5 h60 r90
  text "GND" at 272,-1045.3 h60 r90
  text "GND" at -533.8,-1056.1 h60 r90
  text "VDD" at -599.3,-1331.6 h60
  text "VCC" at 158.9,-1331.6 h60
  text "GND" at -195.3,-1332.5 h60
  text "GND" at 401.8,-1334.2 h60
Outline:
  the board outline again, w3.94
Mechanical 2:
  lines w10: -2987.28,-2755.98 -1140.13,-2755.98
Mechanical 4:
  text "No changes to materials and/or gerber files are permitted without written approval from Smart Halo. /   / 1.       Board spec. /          a.       Board shall be manufactured to meet all spec. defined under the latest revision of IPC-6012 class 2 & IPC-A-600 class 2. / 2.       Material /          a.       See PCB requirement spec PDF /          b.      Material must be lead free compliant per IPC-4101A/24 or /26. /          c.       Maximum thickness 0.062\" +/- 0.006\" measured over solder mask /          d.      Outer layers copper foil (    )1/2 OZ./SQ.FT OR (X)1 OZ./SQ.FT OR (    )2 OZ./SQ.FT. /          e.      Inner layers copper foil (    )1/2 OZ./SQ.FT OR ( X)1 OZ./SQ.FT OR (    )2 OZ./SQ.FT. /          f.        Boards rated & identified to UL 94V0. / 3.       Gerber files /          a.       Supplied gerber files must not be modified by manufacturer without prior permission from Smart Halo. /          b.      Copper addition is not permitted on any layers unless otherwise specified. /          c.       Copper addition in breakaway areas for panel forms is acceptable. /          d.      Manufacturing logo, UL and date code must be added as specified on panel from mechanical drawing. /          e.      Gerber traces, components pads & vias pads widths are finished widths. Finished width accuracy on inner layers +/- 0.001\". / 4.       Plated Holes /          a.       Plated thru holes, unless otherwise specified, are sizes show after plating. Wall thickness of plated thru holes shall be 0.001¨, min etch back or smear removals shall be 0.0002\" min and 0.003\"max. / 5.       Solder mask /          a.       Apply photo imageable solder mask as per specification IPC-SM-840 to both sides of PWB over bare copper, WHITE, Taiyo PSR-4000 WT05 /          b.      Solder mask thickness: 0.0008\"min.  /  0.001\" max. /          c.       Solder mask registration: +/- 0.002\" /          d.      In order to avoid oversizing of components pads being part of copper plane or vias, solder mask must not be modified. Solder mask compensation already applied in gerber files in order to meet registration value. /          e.      Soldermask :  no soldermask opening should be more then 3 mils expansion from the pad size. For BGA, LGA and QFN or QFP Fine Pitch,  max 2.5 mils expansion.  / 6.       Finish /          a.       RoHS compliant (EU directive 2002/95/EC) 2-10 uIN immersion Gold over 50-200 uIN Electroless Nickel (ENIG). /          b.      No exposed copper. / 7.       Silkscreen /          a.       Apply silkscreen to top & bottom side of PWB using non conductive BLACK epoxy based ink. /          b.      Cut silkscreen using solder mask clearance. / 8.       Electrical test /          a.       100% electrical testing required. / 9.       Vias /          a.       All via diameter to be within tolerance specified in point 3. / 10.   Stackup /          a.       Material as per stackup drawing. See PCB requirement spec PDF" at 1572.6,-1381.1 h78.74
Drill Drawing:
  circle w10: c1607.26,4715.43 r20
  circle w10: c1607.26,4715.43 r33.33
  lines w10: 1573.92,4532.1 1640.59,4532.1 1640.59,4598.77 1573.92,4598.77 1573.92,4532.1
  lines w15: 1514.13,4487.1 7726.42,4487.1 ; 1514.13,4787.1 7726.42,4787.1 ; 2065.01,4337.1 2065.01,4937.1 ; 2654.85,4337.1 2654.85,4937.1 ; 3774.52,4337.1 3774.52,4937.1 ; 4280.4,4337.1 4280.4,4937.1 ; 5014.2,4337.1 5014.2,4937.1 ; 6347.81,4337.1 6347.81,4937.1 ; 1514.13,4337.1 7726.42,4337.1 7726.42,4937.1 1514.13,4937.1 1514.13,4337.1
  text "Symbol" at 1604.13,4832.1 h72
  text "Count" at 2110.01,4832.1 h72
  text "Hole Size" at 2699.85,4832.1 h72
  text "Plated" at 3819.52,4832.1 h72
  text "Hole Type" at 4325.4,4832.1 h72
  text "Hole Tolerance (+)" at 5059.2,4832.1 h72
  text "Hole Tolerance (-)" at 6392.81,4832.1 h72
  text "60" at 2110.01,4682.1 h60
  text "0,900mm (35,43mil)" at 2699.85,4682.1 h60
  text "PTH" at 3819.52,4682.1 h60
  text "Round" at 4325.4,4682.1 h60
  text "96" at 2110.01,4532.1 h60
  text "0,254mm (10,00mil)" at 2699.85,4532.1 h60
  text "PTH" at 3819.52,4532.1 h60
  text "Round" at 4325.4,4532.1 h60
  text "156 Total" at 2110.01,4382.1 h60